# Altium PCB CareBoard_SMD_ORDERED_6.29.PcbDoc
Units mil, origin at the board's own origin, x right, y up, seen from the top; angles counter-clockwise.
Board outline 6963 x 2600 mil, 2 copper layers (Top Layer, Bottom Layer); 85 components, 76 nets, 330 pads, 96 vias.
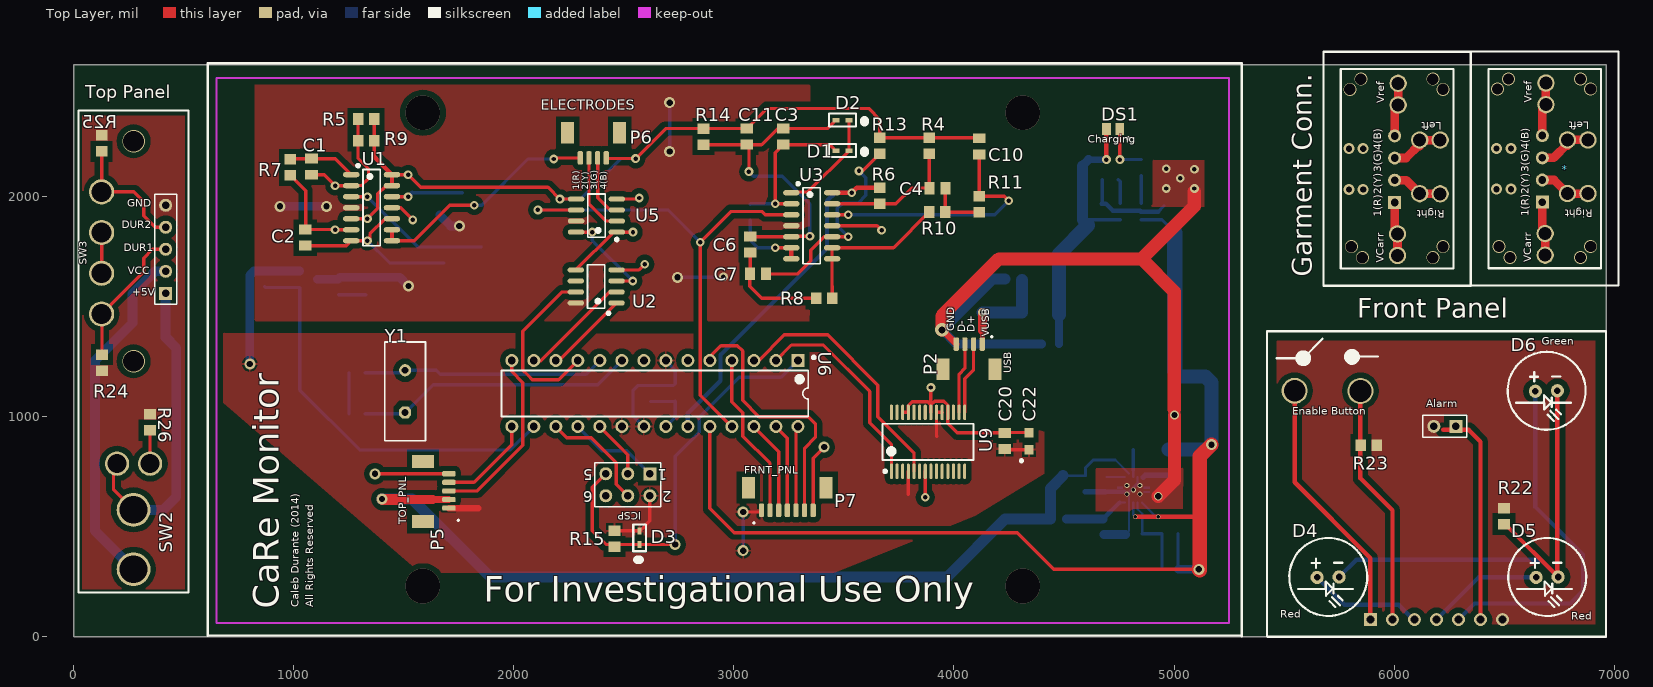
[diagram p0: Top Layer view]
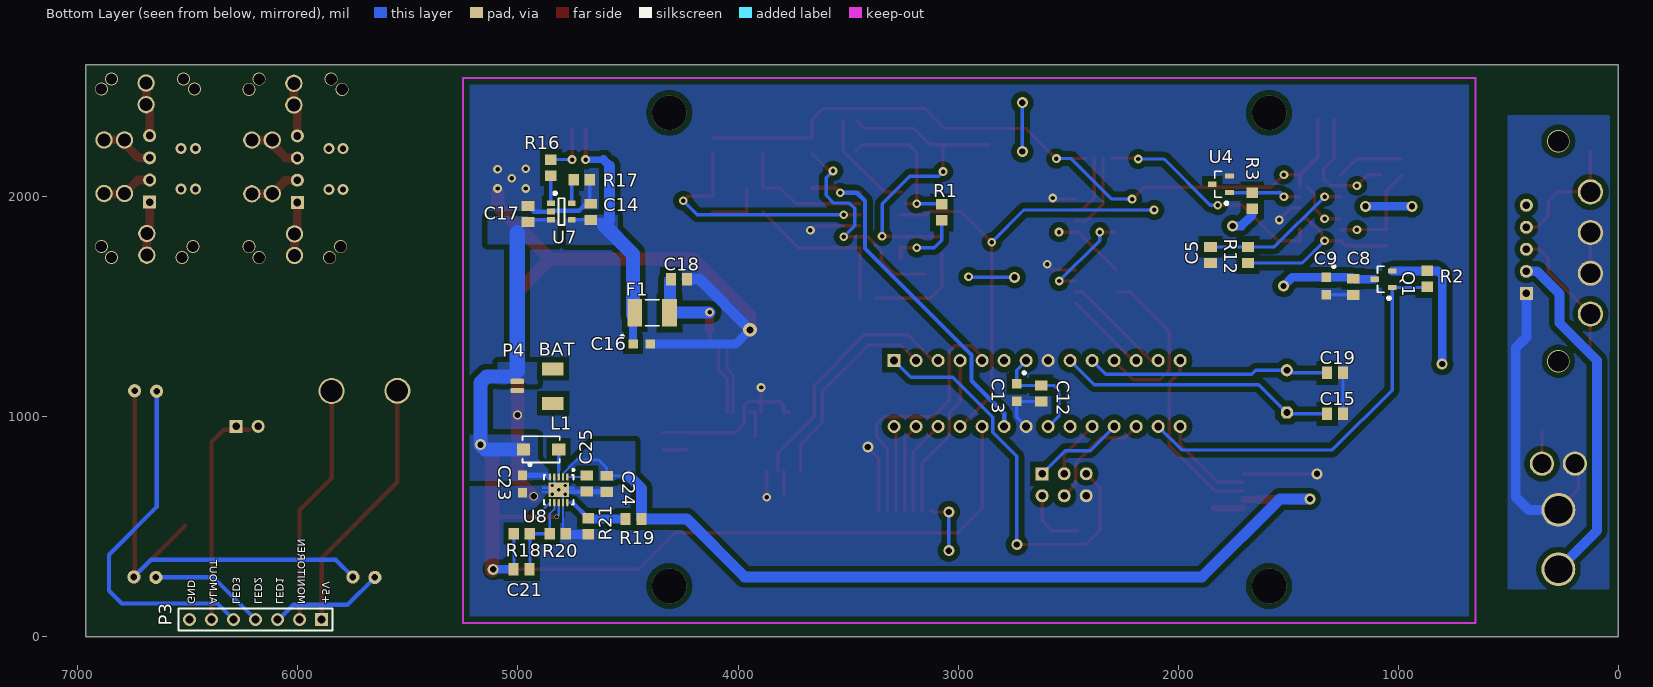
[diagram p1: Bottom Layer view, seen from below]
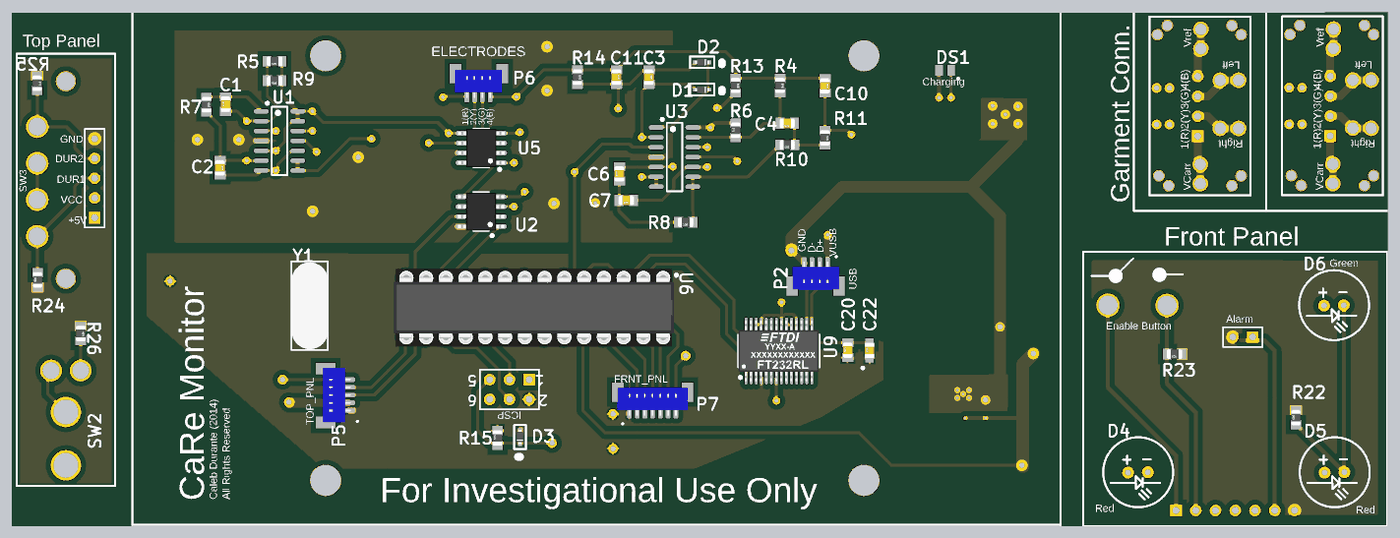
[diagram p2: 3D render of the assembled board from above, using the file's embedded part models]
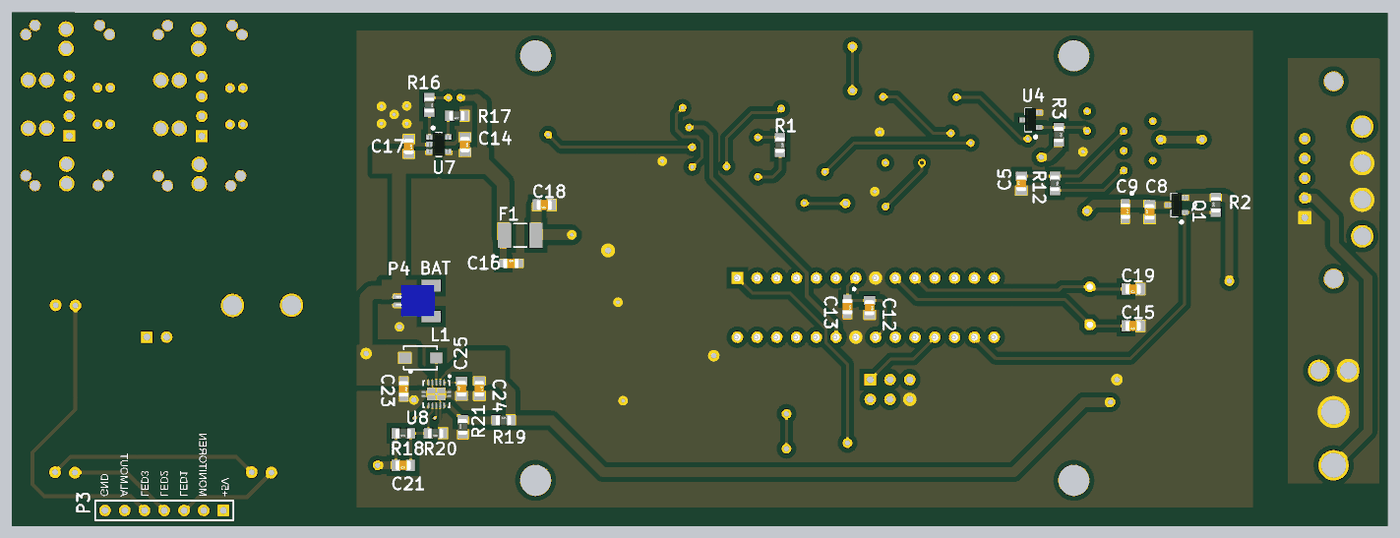
[diagram p3: 3D render of the assembled board from below, using the file's embedded part models]

## Layer stack, top to bottom
Top Layer: signal copper 1.4
Dielectric: dielectric 12.6, FR-4, Dk 4.8
Bottom Layer: signal copper 1.4

## Board outline
0,0 6963,0 6963,2600 0,2599

## Design rules (kind name [scope] priority, off if disabled: settings)
Clearance "Polygon Clearance" [All vs InPolygon] p1: gap=25 // Distance between polygons and different nets
Clearance [All] p2: gap=5 // Trace/Space
ComponentClearance [All] p1: gap=20 collisioncheckmode=3 verticalgap=20 showdistances=TRUE
FanoutControl Fanout_Default [All] p5: bgadir=Out bgaviamode=Centered fanoutstyle=Auto fanoutdirection=OutOnly viagrid=1 // Fanout_Default (Default Rule)
HoleSize [All] p1: absolutevalues=TRUE maxlimit=160 minlimit=15 maxpercent=80.000 minpercent=20.000
MinimumAnnularRing [All] p1: minimumring=8
MinimumSolderMaskSliver [All] p1: minsoldermaskwidth=1
PolygonConnect PolygonConnect_1 [All vs IsNamedPolygon('+5V')] p1: connectstyle=Relief reliefconductorwidth=10 reliefentries=4 polygonreliefangle="90 Angle" airgapwidth=10
PolygonConnect [All] p2: connectstyle=Direct reliefconductorwidth=10 reliefentries=4 polygonreliefangle="90 Angle" airgapwidth=10
RoutingVias [All] p1: holewidth=20 width=40 viastyle="Through Hole" minholewidth=15 minwidth=35 maxholewidth=30 maxwidth=50
SilkToSilkClearance [All] p1: silktosilkclearance=1
SilkToSolderMaskClearance SilkscreenOverComponentPads [IsPad] p1: minsilkscreentomaskgap=1 clearancetoexposedcopper=TRUE
SolderMaskExpansion [All] p1: expansion=4
Width [All] p1: maxlimit=250 minlimit=7 preferedwidth=15
22 further rules are at their usual default settings.

## Classes and differential pairs
component class CaRe_Schematic_SMD_TOP_PANEL: R24 R25 R26 SW2 SW3 ""
component class CaRe_Schematic_SMD_FRONT_PANEL: Alarm D4 D5 D6 "Enable Button" P3 R22 R23

## Components (designator, comment, footprint, x,y, rotation, side; value= is the part's Value field where it differs from the comment)
* "GARMENT_CONNECTOR" GARMENT_DIN 6940.5,1675 r90 top
Alarm "Speaker" HDR1X2 6280.5,956.5 r180 top (schematic designator LS1)
C1 "Capacitor" CAP0805 1081.19,2136 r90 top
C2 "Capacitor" CAP0805 1052.5,1814 r270 top
C3 "Capacitor" CAP0805 3224.5,2272.9 r270 top
C4 "Capacitor" CAP0805 3924.82,2039 r180 top
C5 "Capacitor" CAP0805 1853.5,1735 r90 bottom
C6 "Capacitor" CAP0805 3074.5,1783 r90 top
C7 "Capacitor" CAP0805 3109.29,1649 r180 top
C8 "Capacitor" CAP0805 1203.9,1590.68 r90 bottom
C9 "10uF" 0805TANTCAP 1327.5,1594.13 r270 bottom
C10 "Capacitor" CAP0805 4115.5,2229 r270 top
C11 "Capacitor" CAP0805 3059.5,2272.9 r270 top
C12 "Capacitor" CAP0805 2621.5,1105.76 r270 bottom
C13 "10uF" 0805TANTCAP 2733.99,1110.68 r270 bottom
C14 "Capacitor" CAP0805 4670.35,1931.42 r270 bottom
C15 "Capacitor" CAP0805 1287.5,1013.23 r0 bottom
C16 "10uF" 0805TANTCAP 4437.5,1330 r180 bottom
C17 "Capacitor" CAP0805 4954.5,1922 r270 bottom
C18 "Capacitor" CAP0805 4268.5,1625.13 r0 bottom
C19 "Capacitor" CAP0805 1287.5,1199.6 r0 bottom
C20 "Capacitor" CAP0805 4230.82,890.31 r90 top
C21 "Capacitor" CAP0805 4983.09,307 r0 bottom
C22 "10uF" 0805TANTCAP 4340.82,889 r90 top
C23 "10uF" 0805TANTCAP 4980.09,694 r270 bottom
C24 "Capacitor" CAP0805 4597.09,695.58 r270 bottom
C25 "Capacitor" CAP0805 4687.09,696 r90 bottom
D1 "BAT42W" SOD-523 3493.5,2208.9 r180 top
D2 "BAT42W" SOD-523 3493.5,2347.9 r180 top
D3 "BAT42W" SOD-523 2571.51,450 r90 top
D4 "10mmTT" 10MMLED 5650.01,270 r0 top
D5 "10mmTT" 10MMLED 6645.01,270 r0 top
D6 "10mmTT" 10MMLED 6642.01,1116 r0 top
DS1 "CHIPLED_RED" CHIP_LED0805 4723.5,2307.59 r180 top
"Enable Button" "SW-SPST" SPST 5548.01,1118 r0 top (schematic designator S1)
F1 "MF-MSMF050-1" "MF-MSMF050 FOOTPRINT" 4390.5,1472 r0 bottom
"Garment Conn." "GARMENT_CONNECTOR" GARMENT_DIN 6269.5,1674 r90 top (schematic designator *)
ICSP "ICSP" HDR2X3 2618.21,741 r180 top (schematic designator P1)
L1 "4.7uH" INDP4330X10N 4895.09,851 r180 bottom
P2 "USB" "JST 4-PIN SMD" 4187.61,1339.17 r180 top
P3 "Header 7" HDR1X7 5892.5,78.5 r0 bottom
P4 "BAT" "JST-2 PIN SMD CONNECTOR" 5019.5,1219 r270 bottom
P5 "TOP_PNL" "JST 5 PIN SMD" 1715.5,525 r90 top
P6 "ELECTRODES" "JST 4-PIN SMD" 2243.5,2167 r0 top
P7 "FRNT_PNL" "JST-SH 7-PIN VERTICAL SMD" 3065.5,550 r0 top
P8 "Header 5" HDR1X5 418.5,1561 r90 top
Q1 "BSP304" SOT23_L 1067.5,1625.13 r0 bottom
R1 "Resistor" RES0805 3074.82,1928.9 r270 bottom
R2 "Resistor" RES0805 868.5,1626.5 r90 bottom
R3 "Resistor" RES0805 1664.19,1982 r270 bottom
R4 "Resistor" RES0805 3888.52,2231 r270 top
R5 "Resistor" RES0805 1329.19,2352.71 r180 top
R6 "Resistor" RES0805 3663.5,2004 r90 top
R7 "Resistor" RES0805 984.5,2133.46 r270 top
R8 "Resistor" RES0805 3410.5,1538 r180 top
R9 "Resistor" RES0805 1329.19,2254.69 r180 top
R10 "Resistor" RES0805 3924.82,1930.42 r180 top
R11 "Resistor" RES0805 4115.5,1966 r270 top
R12 "Resistor" RES0805 1683.5,1735 r270 bottom
R13 "Resistor" RES0805 3663.5,2231 r270 top
R14 "Resistor" RES0805 2862.5,2272.9 r270 top
R15 "Resistor" RES0805 2457.51,446 r90 top
R16 "Resistor" RES0805 4850.5,2132.22 r270 bottom
R17 "Resistor" RES0805 4710.77,2077.32 r0 bottom
R18 "Resistor" RES0805 4982.09,469 r0 bottom
R19 "Resistor" RES0805 4475.09,535 r180 bottom
R20 "Resistor" RES0805 4819.09,469 r0 bottom
R21 "Resistor" RES0805 4681.09,502 r90 bottom
R22 "Resistor" RES0805 6499.5,548.5 r90 top
R23 "Resistor" RES0805 5885.5,870.5 r180 top
R24 "Resistor" RES0805 129.5,1246 r90 top
R25 "Resistor" RES0805 127.5,2242 r270 top
R26 "Resistor" RES0805 347.5,975 r270 top
SW2 "On/Off Rocker Swith" POWER_SWITCH 272.5,307 r90 top
SW3 "Slider Switch" SLIDER 272.5,1252 r90 top
U1 "TLV274IN" TI-D14_L 1354.19,1950 r0 top
U2 "XXXXX" SOIC-8 2374.5,1592 r180 top
U3 "TLV274IN" TI-D14_L 3353.82,1867.9 r0 top
U4 "LM4040" SOT23_L 1806.19,2056 r0 bottom
U5 "LT1920" LT-S8-8_L(LT1920) 2375.82,1914 r180 top
U6 "ATmega328P-PU" 28P3 2641.19,1105.76 r270 top
U7 "MCP73831T-2ADI/OT" SOT-23-OT5_L 4802.5,1932.32 r180 bottom
U8 "TPS61200DRCT" DRC10-2400X1650TP 4815.09,668 r270 bottom
U9 "FT232RL-Reel" SSOP-28_L(FTDI) 3882.5,886 r90 top
Y1 "ECS-10-3-1" HC-49U 1506.5,1115.23 r90 top

## Footprints (in the part's own frame and the unit in brackets; to place one, negate y for a bottom-side part, rotate by r counter-clockwise, add the part's x,y. Pads: shape width x height; smd on the part's side, far side on the other; paste and mask are expansions set on the pad)
10MMLED [mil]
  round 60 hole 30: 1(0,0) 2(100,2)
  silkscreen extent -126,-175 228,179
28P3 [mm] "DIP, 28-Leads, Row Spacing 7.62mm, Pitch 2.54mm, Body 34.67x7.3mm"
  rect 1.5x1.5 hole 0.9: 1(-3.81,16.51)
  round 1.5 hole 0.9: 2(-3.81,13.97) 3(-3.81,11.43) 4(-3.81,8.89) 5(-3.81,6.35) 6(-3.81,3.81) 7(-3.81,1.27) 8(-3.81,-1.27) 9(-3.81,-3.81) 10(-3.81,-6.35) 11(-3.81,-8.89) 12(-3.81,-11.43) 13(-3.81,-13.97) 14(-3.81,-16.51) 15(3.81,-16.51) 16(3.81,-13.97) 17(3.81,-11.43) 18(3.81,-8.89) 19(3.81,-6.35) 20(3.81,-3.81) 21(3.81,-1.27) 22(3.81,1.27) 23(3.81,3.81) 24(3.81,6.35) 25(3.81,8.89) 26(3.81,11.43) 27(3.81,13.97) 28(3.81,16.51)
  silkscreen extent -4.29,-17.7 2.65,18.46, body extent -5.05,-18 5.05,18, height 8.89
0805TANTCAP [mm] "0805 TANTALUM CAPACITOR MOLDED"
  rect 1.1x1.05 smd: 1(-1,0) 2(1,0)
  silkscreen extent -2.36,0.76 -2.16,0.96, body extent -1,-0.62 1,0.63, height 0.78
CAP0805 [mm] "Chip Capacitor 0805 Package"
  rect 1.15x1.45 smd: 1(-0.925,0) 2(0.925,0)
  body extent -1,-0.62 1,0.63, height 0.78
CHIP_LED0805 [mm] "LED 0805"
  rect 1x1.35 smd: 1(-0.775,0) 2(0.775,0)
  silkscreen extent -1.75,1.02 -1.65,1.12, body extent -1.07,-0.7 1.07,0.7, height 1.1
DRC10-2400X1650TP [mm] "SON, 10-Leads, Body 3x3mm, Pitch 0.5mm, Thermal Pad 2.4x1.65mm, TI Recommended"
  oval 0.85x0.28 smd paste-0.025 mask+0.07: 1(-1.475,1) 2(-1.475,0.5) 3(-1.475,0) 4(-1.475,-0.5) 5(-1.475,-1) 6(1.475,-1) 7(1.475,-0.5) 8(1.475,0) 9(1.475,0.5) 10(1.475,1)
  rect 1.65x2.4 smd paste-0.825 mask+0.07: 11(0,0)
  Top Layer region: -0.39,1.9 -0.11,1.9 -0.11,1.2 -0.39,1.2
  Top Layer region: 0.39,1.2 0.11,1.2 0.11,1.9 0.39,1.9
  Top Layer region: 0.39,-1.9 0.11,-1.9 0.11,-1.2 0.39,-1.2
  Top Layer region: -0.39,-1.2 -0.11,-1.2 -0.11,-1.9 -0.39,-1.9
  silkscreen extent -2.34,-1.7 1.7,1.75, body extent -1.55,-1.55 1.55,1.55, height 1
GARMENT_DIN [mm]
  rect 1.5x1.5 hole 0.9: 1(7.62,6.782)
  round 1.5 hole 0.9: 2(10.179,6.782) 3(12.738,6.782) 4(15.298,6.782)
  round 2 hole 1.5: 6(3.99,6.452) 6(8.611,1.524) 6(14.808,1.524) 6(21.363,6.375) 7(1.499,6.452) 7(8.627,3.886) 7(14.808,3.886) 7(18.872,6.375)
  Top Layer lines w1: 7.62,6.782 4.32,6.782 3.99,6.452 1.499,6.452 ; 10.179,6.782 10.179,5.439 8.611,3.87 8.611,1.549 ; 12.738,6.782 12.738,5.473 14.326,3.886 14.808,3.886 14.122,3.886 ; 15.298,6.782 18.466,6.782 18.872,6.375 21.363,6.375 ; 14.808,3.861 14.808,1.524
  silkscreen extent -2,-2 25,15
HC-49U [mm] "Quartz Crystal, Thru-Hole; 2 Leads; Body 11.35 x 4.65 x 13.46 mm (LxWxH max)"
  oct 1.4x1.4 hole 0.8: 1(-2.44,0)
  round 1.4 hole 0.8: 2(2.44,0)
  silkscreen extent -5.7,-2.35 5.7,2.35, body extent -5.59,-2.36 5.58,2.31, height 13.49
HDR1X2 [mm] "Connector; Header; 2 Position"
  rect 1.5x1.5 hole 0.9: 1(0,0)
  round 1.5 hole 0.9: 2(2.54,0)
  silkscreen extent -1.27,-1.27 3.81,1.27
HDR1X5 [mm] "Connector; Header; 5 Position"
  rect 1.5x1.5 hole 0.9: 1(0,0)
  round 1.5 hole 0.9: 2(2.54,0) 3(5.08,0) 4(7.62,0) 5(10.16,0)
  silkscreen extent -1.27,-1.27 11.43,1.27
HDR1X7 [mm] "Connector; Header; 7 Position"
  rect 1.5x1.5 hole 0.9: 1(0,0)
  round 1.5 hole 0.9: 2(2.54,0) 3(5.08,0) 4(7.62,0) 5(10.16,0) 6(12.7,0) 7(15.24,0)
  silkscreen extent -1.27,-1.27 16.51,1.27
HDR2X3 [mm] "Connector; Header; 3x2 Position"
  rect 1.5x1.5 hole 0.9: 1(0,0)
  round 1.5 hole 0.9: 2(0,2.54) 3(2.54,0) 4(2.54,2.54) 5(5.08,0) 6(5.08,2.54)
  silkscreen extent -1.27,-1.27 6.35,3.81
INDP4330X10N [mm] "Precision Wire Wound Inductor, 2-Leads, Body 4.30x3.00mm, IPC Medium Density"
  rect 1.55x1.4 smd: 1(-2.025,0) 2(2.025,0)
  silkscreen extent -2.15,-1.5 2.15,1.52
"JST 4-PIN SMD" [mm] "BM04B-SRSS-TB"
  rrect50% 0.6x1.55 smd: 1(1.499,0.229) 2(2.498,0.229) 3(3.497,0.229) 4(4.496,0.229)
  rect 1.5x2.5 smd: ""(0.025,3.15) ""(6.045,3.15)
  body extent 0,0 6,3.6, height 4.25
"JST 5 PIN SMD" [mil] "BM05B-SRSS-TB"
  rrect50% 23.62x61.02 smd: 1(60,10) 2(99,10) 3(138,10) 4(177,10) 5(216,10)
  rect 59.06x98.43 smd: ""(-1,128) ""(272,128)
  body extent 0,0 276,142
"JST-2 PIN SMD CONNECTOR" [mm] "SM02B-SRSS-TB"
  rrect50% 0.6x1.55 smd: 1(1.473,0.406) 2(2.54,0.406)
  rect 1.5x2.5 smd: ""(0.051,4.521) ""(4.013,4.521)
  body extent 0,0 4,4.95, height 3.01
"JST-SH 7-PIN VERTICAL SMD" [mm]
  rrect50% 0.6x1.55 smd: 1(1.524,0.635) 2(2.519,0.635) 3(3.514,0.635) 4(4.508,0.635) 5(5.503,0.635) 6(6.498,0.635) 7(7.493,0.635)
  rect 1.5x2.5 smd: ""(0.025,3.251) ""(8.992,3.251)
  body extent 0,0.21 9,3.81, height 4.25
LT-S8-8_L(LT1920) [mm] "SOIC, 8-Leads, Body 4.9x3.9mm, Pitch 1.27mm, IPC High Density"
  oval 1.9x0.6 smd: 1(-2.35,1.905) 2(-2.35,0.635) 3(-2.35,-0.635) 4(-2.35,-1.905) 5(2.35,-1.905) 6(2.35,-0.635) 7(2.35,0.635) 8(2.35,1.905)
  silkscreen extent -2.48,-2.5 1,2.88, body extent -3,-2.45 3,2.45, height 1.75
"MF-MSMF050 FOOTPRINT" [mm] "PTC FUSE"
  rect 1.7x3.2 smd: 1(-2,0) 2(2,0)
  silkscreen extent -0.8,-1.5 0.8,1.5, body extent -2.37,-1.71 2.36,1.71, height 0.85
POWER_SWITCH [mm] "SPST Rocker w/ LED"
  round 3.9 hole 3.2: 1(0,0) 2(6.858,0)
  round 2.8 hole 2.2: 3(12.192,1.905) 4(12.192,-1.905)
RES0805 [mm] "Chip Resistor, 2-Leads, Body 2.00x1.25mm, IPC Medium Density"
  rect 1.2x1.35 smd: 1(-0.925,0) 2(0.925,0)
  body extent -1,-0.62 1,0.63, height 0.78
SLIDER [mm]
  round 2.9 hole 2.3 unplated: 1(5.461,3.683) 2(10.16,3.683) 3(14.859,3.683) 4(19.558,3.683)
SOD-523 [mm]
  rect 0.8x0.5 smd: 1(-0.762,0) 2(0.762,0)
  silkscreen extent -2.54,-0.76 1.55,0.74, body extent -0.91,-0.42 0.91,0.42, height 0.71
SOIC-8 [mm] "SOIC, 8-Leads, Body 4.9x3.9mm, Pitch 1.27mm, IPC High Density"
  oval 1.9x0.6 smd: 1(-2.35,1.905) 2(-2.35,0.635) 3(-2.35,-0.635) 4(-2.35,-1.905) 5(2.35,-1.905) 6(2.35,-0.635) 7(2.35,0.635) 8(2.35,1.905)
  silkscreen extent -1.55,-2.5 1,3.22, body extent -3,-2.45 3,2.45, height 1.75
SOT23_L [mm] "SOT23, 3-Leads, Body 2.9x1.3mm, Pitch 0.95mm, Lead Span 2.3mm, IPC High Density"
  rect 1x0.6 smd: 1(-1,0.95) 2(-1,-0.95) 3(1,0)
  silkscreen extent -0.76,-1.5 0.7,2.31, body extent -1.27,-1.52 1.27,1.48, height 1.1
SOT-23-OT5_L [mm] "SOT23, 5-Leads, Body 2.9x1.6mm, Pitch 0.95mm, Lead Span 2.7mm, IPC High Density"
  rect 0.9x0.65 smd: 1(-1.2,0.95) 2(-1.2,0) 3(-1.2,-0.95) 4(1.2,-0.95) 5(1.2,0.95)
  silkscreen extent -0.86,-1.55 0.35,2.23, body extent -1.53,-1.5 1.53,1.5, height 1.45
SPST [mm] "Momentary Enable Button"
  round 3 hole 2.5: 1(0,0) 2(7.595,-0.025)
  silkscreen extent -2.08,3.35 9.63,5.99
SSOP-28_L(FTDI) [mm] "SOP, 28-Leads, Body 10.2x5.3mm, Pitch 0.65mm, IPC High Density"
  oval 1.8x0.35 smd: 1(-3.4,4.225) 2(-3.4,3.575) 3(-3.4,2.925) 4(-3.4,2.275) 5(-3.4,1.625) 6(-3.4,0.975) 7(-3.4,0.325) 8(-3.4,-0.325) 9(-3.4,-0.975) 10(-3.4,-1.625) 11(-3.4,-2.275) 12(-3.4,-2.925) 13(-3.4,-3.575) 14(-3.4,-4.225) 15(3.4,-4.225) 16(3.4,-3.575) 17(3.4,-2.925) 18(3.4,-2.275) 19(3.4,-1.625) 20(3.4,-0.975) 21(3.4,-0.325) 22(3.4,0.325) 23(3.4,0.975) 24(3.4,1.625) 25(3.4,2.275) 26(3.4,2.925) 27(3.4,3.575) 28(3.4,4.225)
  silkscreen extent -3.52,-5.25 2.1,5.25, body extent -3.88,-5.12 3.88,5.21, height 2.16
TI-D14_L [mm] "SOIC, 14-Leads, Body 8.65x3.9mm, Pitch 1.27mm, IPC High Density"
  oval 1.9x0.6 smd: 1(-2.35,3.81) 2(-2.35,2.54) 3(-2.35,1.27) 4(-2.35,0) 5(-2.35,-1.27) 6(-2.35,-2.54) 7(-2.35,-3.81) 8(2.35,-3.81) 9(2.35,-2.54) 10(2.35,-1.27) 11(2.35,0) 12(2.35,1.27) 13(2.35,2.54) 14(2.35,3.81)
  silkscreen extent -1.7,-4.4 1,4.98, body extent -2,-4.38 2,4.38, height 1.75

## Part data
Alarm: "Loudspeaker"
C1 C2 C3 C4 C5 C6 C7 C8 C10 C11 C12 C14 C15 C17 C18 C19 C20 C21 C24 C25: library part "Chip Cap"
C9 C13 C16 C22 C23: library part "Cap Tant", "Polarized Capacitor (Radial)"
D1 D2 D3: "Schottky Diode"
D4 D5 D6: library part 10mmLED, "Typical RED LED"
DS1: "Typical RED LED"
"Enable Button": "Single-Pole, Single-Throw Switch"
F1: library part "PTC Fuse", "PTC Resettable Fuse 500 mA"
ICSP: library part "Header 3X2", "Header, 3-Pin, Dual row"
L1: library part Inductor, "Inductor"
P2 P6: library part "Header 4", "Header, 4-Pin"
P3: "Header, 7-Pin"
P4: library part "Header 2", "Header, 2-Pin"
P5: library part "Header 5", "Header, 5-Pin"
P7: library part "Header 7", "Header, 7-Pin"
P8: "Header, 5-Pin"
Q1: "P-channel Enhancement Mode Vertical D-MOSFET"
R1 R2 R3 R4 R5 R6 R7 R8 R9 R10 R11 R12 R13 R14 R15 R16 R17 R18 R19 R20 R21 R22 R23 R24 R25 R26: library part "Chip Res"
SW2: library part "ON/OFF Rocker"
SW3: library part SLIDER
U1 U3: "JFET-Input Operational Amplifier"
U2: library part DS1804-050, "Nonvolatile Trimmer Potentiometer"
U4: "Precision Micropower Shunt Voltage Reference, 0.1% accuracy, 2.5 V, 15 ppm / degC, 15 mA, -40 to 85 degC, 3-pin SOT-23 (DBZ), Green (RoHS & no Sb/Br)"
U5: library part AD620AN, "Low-Cost, Low-Power Instrumentation Amplifier"
U6: "8-bit AVR Microcontroller, 32KB Flash, 1KB EEPROM, 2KB SRAM, 28-pin PDIP, Industrial Grade (-40°C to 85°C)"
U7: "Miniature Single-Cell, Fully Integrated Li-Ion, Li-Polymer Charge Management Controller, 4.2V, 5-Pin SOT-23, Industrial Temperature, Tape and Reel"
U8: "Boost Voltage Converter with 0.3 to 5.5 V Input and 1.8 to 5.5 V Output, -40 to 85 degC, 10-Pin SON (DRC), Green (RoHS & no Sb/Br)"
U9: "USB UART Asynchronous Serial Data Transfer Chip, SSOP-28, Tape and Reel"
Y1: library part ECS-10-13-1, "Crystal Oscillator"

## Via types
v1: diameter 40, hole 20, Top Layer to Bottom Layer, 40 vias
v2: diameter 50, hole 28, Top Layer to Bottom Layer, 24 vias
v3: diameter 59.06, hole 51.18, Top Layer to Bottom Layer, 16 vias
v4: diameter 22.83, hole 14.96, Top Layer to Bottom Layer, 5 vias
v5: diameter 157/157 (per signal layer), hole 157, Top Layer to Bottom Layer, 4 vias
v6: diameter 20, hole 15, Top Layer to Bottom Layer, 2 vias
v7: diameter 40, hole 28, Top Layer to Bottom Layer, 2 vias
v8: diameter 102.36, hole 94.49, Top Layer to Bottom Layer, 2 vias
v9: diameter 62, hole 32, Top Layer to Bottom Layer, 1 vias

## Nets (pads, with @x,y where several pads share a name; then routed paths per layer and width w, separated by ;. In a path a pad name is that pad's centre, name@x,y a point inside that pad or via, vN(x,y) a via of type N, cw(c..) or ccw(c..) an arc to the next point about the centre after c; other vN are vias at no path point)
+3.3V: U9.17
+5V: C12.1 C13.1 C20.1 C22.1 D3.2 ICSP.2 P5.1 P7.1 Q1.2 R2.2 R15.2 U6.7 U6.20 U6.21 U9.4 U9.19 U9.20 | length 2179.7
  Top Layer w15: 1836.5,584 1837.5,585 ; R15.2 D3.2@2569.09,482.41 ; D3.2 2618.21,526.7 ICSP.2 ; v2(3042.5,567.63) 3118.13,567.63 P7.1 ; 3792.94,647 U9.4 ; 3921.5,911 3920.89,911.61 U9.20 U9.19 ; C20.1 4235.08,849.63 C22.1
  Top Layer w30: P5.1 1837.5,585
  Bottom Layer w15: Q1.2@1027.74,1662.92 Q1.2 ; U6.21@2590.5,954.91 2541.74,1003.68 2541.74,1119.24 2564.68,1142.17 C12.1 C13.1@2726.12,1142.17 ; U6.7@2690.5,1254.91 2733.99,1211.43 C13.1 ; v2(3042.5,391.28) v2(3042.5,567.63)
  Bottom Layer w40: v2(800.5,1240) 800.5,1643 820.42,1662.92 R2.2 Q1.2@1027.74,1662.92
+5V_F: "Enable Button.1" P3.1 | length 1182.2
  Top Layer w20: 5548.01,1118 5548.01,702 5892.5,357.5 P3.1
+5V_T: P8.1 SW2.2 SW2.3 SW3.2 SW3.3 | length 1602.6
  Top Layer w15: SW3.2 SW3.3 ; SW2.3 181.5,771 181.5,668 SW2.2
  Bottom Layer w45: SW2.2 407.39,577 466.5,636.11 466.5,1313 418.5,1361 P8.1
ALMOUT: P7.6 U6.5 | length 1211.4
  Top Layer w15: U6.5@2890.5,1254.91 2890.5,1272 2941.5,1323 3016.5,1323 3040.5,1299 3040.5,1074 3113.92,1000.58 3338.92,1000.58 3370.93,968.58 3370.93,907.4 3321.34,857.81 P7.6
ALMOUT_F: Alarm.1 P3.6 | length 1000.4
  Top Layer w20: 6222.5,940.5 6338.5,940.5 6392.5,886.5 P3.6
ATRX: U6.2 U9.1 | length 947.6
  Top Layer w15: U6.2@3190.5,1254.91 3261.59,1326 3406.5,1326 3617.5,1115 3617.5,973 3716.16,874.34 U9.1
ATTX: U6.3 U9.5 | length 1166.5
  Top Layer w15: U6.3@3090.5,1254.91 3112.42,1254.91 3229.5,1372 3426.08,1372 3654.5,1143.58 3654.5,1000 3818.53,835.98 U9.5
AVCC_CTRL: Q1.1 R2.1 U6.16 | length 1846
  Bottom Layer w15: R2.1 870.86,1587.72 Q1.1 1028.13,1121.37 1300.5,849 1984.59,849 U6.16@2090.5,954.91
AVS: C8.2 C9.1 Q1.3 R3.2 U1.4 U2.8 U3.4 U5.7 | length 1185.4
  Bottom Layer w15: v2(2708.5,2204.94) v2(2708.5,2427) ; v2(2743.5,1633.5) 2950.11,1633.5 v1(2952.5,1635.89)
  Bottom Layer w40: v2(938.5,1956.21) v2(1148.5,1956.21) ; Q1.3 1201.94,1625.13 C8.2 1210.31,1633.5 C9.1 1481.78,1633.5 v2(1521.64,1593.63) ; 1664.19,1916.31 1713.14,1867.36 v2(1752.5,1867.36)
BATSTAT: U6.6
D+: P2.2 U9.15 | length 327.1
  Top Layer w15: U9.15 4048.84,1172.34 4089.28,1212.77 P2.2
D-: P2.3 U9.16 | length 321.4
  Top Layer w15: U9.16 4023.25,1192.75 4049.94,1219.44 P2.3
DUR1: P5.3 U6.14 | length 827.2
  Top Layer w15: P5.3 1833.5,663 2041.5,871 2041.5,1155 1990.5,1206 U6.14@1990.5,1254.91
DUR1_T: P8.3 R24.2 SW3.1 | length 635.1
  Top Layer w15: R24.2 129.5,1465 SW3.1 318.5,1658 318.5,1721 358.5,1761 P8.3
DUR2: P5.4 U6.15 | length 437.7
  Top Layer w15: P5.4 1819.5,702 1990.5,873 U6.15@1990.5,954.91
DUR2_T: P8.4 R25.2 SW3.4 | length 579.3
  Top Layer w15: R25.2 SW3.4 274.51,2022 318.5,1978 318.5,1913 370.5,1861 P8.4
GAINFBK: U3.3 U5.6 U6.25 | length 2348.2
  Top Layer w15: v1(2109.5,1939.68) 2110.18,1939 U5.6 ; U6.25@2990.5,954.91 2847.5,1097.91 v1(2847.5,1793) 2987.5,1933 3127.5,1933 3142.61,1917.9 U3.3
  Bottom Layer w15: v1(2109.5,1939.68) 2700.83,1939.68 v1(2847.5,1793)
GND: C5.1 C8.1 C9.2 C12.2 C13.2 C14.1 C15.1 C16.2 C17.1 C18.1 C19.1 C20.2 C22.2 C23.2 C24.2 C25.1 ICSP.6 P2.4 P4.2 P5.5 P7.7 R17.1 R20.1 R21.1 U1.11 U2.4 U3.11 U4.2 U5.4 U6.8 U6.22 U7.2 U8.4 U8.9 U8.11 U9.7 U9.18 U9.21 U9.25 U9.26 | length 7297.7
  Top Layer w15: v2(1369.5,741) P5.5 ; U1.11 1485.95,1950 v1(1541.5,1894.45) ; U2.4 2569.5,1667 v1(2595.5,1693) ; U5.4 v1@2565.57,1989 ; P7.7 3360.5,812 v2(3410.5,862) ; U3.11 3650.61,1867.9 v1(3671.5,1847) ; U9.26 U9.25 3792.94,1050.23 3810.5,1067.79 3881.71,1067.79 U9.21@3895.3,1054.2 ; v1(3869.71,634.2) U9.7 ; U9.21 U9.21@3895.3,1054.2 ; v1@3895.5,1133 3895.3,1132.8 U9.21@3895.3,1054.2 ; C20.2 4015.78,926.73 3972.07,970.43 U9.18 3972.07,1053.43 3954.5,1071 3912.1,1071 U9.21@3895.3,1054.2 ; C20.2@4232.46,928.37 C22.2
  Top Layer w30: v9(3945.61,1395.17) P2.4
  Top Layer w60: v9(3945.61,1395.17) 3945.61,1458.11 4204.5,1717 4852.5,1717 ; v7(4928.5,638.47) 5001.77,711.74 v7(5001.77,1008) ; 5001.5,1033 5001.5,1568 4852.5,1717 ; v1@5091.5,2022 5091.5,1956 4852.5,1717
  Bottom Layer w10: C9.2@1327.01,1554.26 C9.2 ; v4(4785.56,648.31) 4795.4,638.47 4795.4,577.88 R20.1@4795.4,481.73 ; U8.11@4834.77,697.53 U8.4
  Bottom Layer w15: C8.1 C9.2@1327.01,1554.26 ; C15.1 C19.1 ; C12.2 2732.02,1069.34 C13.2 2733.99,998.4 U6.22@2690.5,954.91 ; C14.1 4674.35,1971.83 R17.1 ; U8.11@4774.29,659.58 v4(4785.56,648.31) ; U8.11@4795.4,658.16 U8.11@4834.77,697.53 ; U7.2@4846.07,1936 U7.2 ; 4928.41,1932.32 C17.1
  Bottom Layer w20: C14.1 4690.67,1967.83 4722.5,1936 U7.2@4846.07,1936 ; C25.1 U8.11@4774.29,659.58 ; U7.2 4928.41,1932.32
  Bottom Layer w25: C24.2 C25.1@4686.67,659.16
  Bottom Layer w40: v9(3945.61,1395.17) 4010.78,1330 C16.2 ; R21.1 R20.1@4779.25,465.58
  Bottom Layer w50: v9(3945.61,1395.17) 4175.57,1625.13 C18.1
  other v1: 3895.4,1132.9 2570.57,1994 4964.5,2037 5092.7,2037 5028.5,2084 5092.7,2125 4964.5,2127
  other v4: 4844.61,648.31 4815.09,668 4785.56,687.68 4844.61,687.68
GND_F: Alarm.2 P3.7 R22.2 R23.1
GND_T: P8.5 R24.1 R25.1 R26.1
LED1: P7.3 U6.26 | length 426.9
  Top Layer w15: U6.26@3090.5,954.91 3203.84,841.58 P7.3
LED1_F: D4.1 P3.3 | length 516.6
  Bottom Layer w20: D4.1 5774.48,145.53 6020.27,145.53 P3.3@6087.29,78.5
LED2: P7.4 U6.27 | length 401.7
  Top Layer w15: U6.27@3190.5,954.91 3243,902.41 P7.4
LED2_F: D5.1 P3.4 | length 531.8
  Bottom Layer w20: P3.4 6384,270 D5.1
LED3: P7.5 U6.28 | length 383.4
  Top Layer w15: P7.5 3282.17,946.58 U6.28@3290.5,954.91
LED3_F: D6.1 P3.5 | length 1616.4
  Bottom Layer w20: P3.5 6365.5,151.5 6800.5,151.5 6858.5,209.5 6858.5,373.5 6642.01,590 D6.1
MISO: ICSP.1 U6.18 | length 416.3
  Bottom Layer w15: U6.18@2290.5,954.91 2399.42,846 2513.21,846 ICSP.1
MONITOREN: P7.2 U6.4 | length 752.1
  Top Layer w15: U6.4@2990.5,1254.91 2990.5,1068.5 3040.39,1018.61 3040.39,912.11 3164.67,787.83 P7.2
MONITOREN_F: "Enable Button.2" P3.2 R23.2 | length 1098.8
  Top Layer w20: 5847.01,1117 5847.01,721 5992.5,575.5 P3.2
MOSI: ICSP.4 U6.17 | length 514.1
  Top Layer w15: U6.17@2190.5,954.91 2241.42,904 2351.5,904 2465.5,790 2465.5,693.7 ICSP.4
NetC1_1: C1.1 R5.2 R9.2 U1.2 | length 582.2
  Top Layer w13: U1.2 1307.91,2050 1339.26,2081.34 1339.26,2128.25 1292.77,2174.73 R9.2 R5.2
  Top Layer w15: C1.1 1138.68,2099.58 v1(1188.27,2050) U1.2
NetC1_2: C1.2 R7.1 U1.1 | length 308.2
  Top Layer w15: R7.1 987.04,2172.42 C1.2 1189.25,2172.42 U1.1
NetC2_1: C2.1 R7.2 U1.6 | length 485.8
  Top Layer w15: R7.2 1054.5,2027.05 1054.5,1852.42 C2.1 1187.85,1850.42 v1(1188.27,1850) U1.6
NetC2_2: C2.2 R12.2 U1.7 U1.10 | length 835
  Top Layer w15: C2.2 1239.25,1777.58 U1.7 v1(1335.07,1800) 1346.5,1811.43 1346.5,1830.76 1415.74,1900 U1.10@1435.07,1900
  Bottom Layer w15: v1(1335.07,1800) 1436.49,1698.58 R12.2
NetC3_1: C3.1 C6.2 C11.2 D2.2 R14.2 U3.5 | length 1530.8
  Top Layer w15: R14.2 C11.2 ; v1(3068.5,2113.78) 3068.5,2227.48 C11.2 ; C6.2 3076.02,1817.9 U3.5 3263.4,1820 v1(3345.5,1820) ; D2.2 3424.92,2309.31 3198.82,2309.31 3125.98,2236.48 C11.2
  Bottom Layer w15: v1(3068.5,2113.78) 3089.28,2093 3219.37,2093 3345.5,1966.86 v1(3345.5,1820)
NetC3_2: C3.2 D1.2 R1.1 U3.2 | length 699.2
  Top Layer w15: U3.2@3238.82,1967.9 v1(3187.9,1967.9) 3187.9,2199.87 C3.2 3435.92,2236.48 D1.2
  Bottom Layer w15: R1.1 3077.4,1967.9 v1(3187.9,1967.9)
NetC4_1: C4.1 R10.1 R11.2 | length 263.2
  Top Layer w15: C4.1 R10.1 3962.07,1929.58 R11.2
NetC4_2: C4.2 R4.2 R6.1 U3.13 | length 627.4
  Top Layer w15: U3.13 3446.65,1967.58 R6.1 3736.05,1967.58 3807.47,2039 C4.2 3888.52,2039.12 R4.2
NetC5_2: C5.2 R12.1 U1.3 | length 687.3
  Top Layer w13: U1.3@1261.09,1999.42 U1.3
  Top Layer w15: U1.3 v1(1335.07,2000)
  Bottom Layer w15: v1(1335.07,2000) 1563.65,1771.42 R12.1 C5.2
NetC6_1: C6.1 C7.2 R8.2 | length 477.3
  Top Layer w15: C6.1 3074.5,1650.63 C7.2 3072.87,1593.63 3129.5,1537 ; 3130.5,1538 R8.2
NetC7_1: C7.1 R13.2 U3.10 | length 1026.1
  Top Layer w15: C7.1 3290.68,1649 3349.5,1707.83 3349.5,1756 3411.4,1817.9 U3.10 v1(3519.74,1817.9) ; v1(3568.5,2117) 3585.92,2117 R13.2
  Bottom Layer w15: v1(3519.74,1817.9) 3470.5,1867.13 3470.5,1947 3494.5,1971 3564.5,1971 3599.5,2006 3599.5,2086 v1(3568.5,2117)
NetC10_2: C10.2 R11.1 U3.12 | length 1162.3
  Top Layer w15: U3.12 v1(3519.74,1917.9) ; C10.2 R11.1 4228.88,2002.42 v1(4249.5,1981.8)
  Bottom Layer w15: v1(3519.74,1917.9) 4185.61,1917.9 v1(4249.5,1981.8)
NetC25_2: C25.2 U8.1 | length 82.3
  Bottom Layer w10: C25.2@4693.43,726.07 U8.1
NetD1_1: D1.1 D2.1 U3.1 | length 482.4
  Top Layer w15: U3.1@3257.82,2021.38 3335.98,2021.38 D1.1 D2.1
NetD4_2: D4.2 D5.2 D6.2 R22.1 | length 2203.6
  Top Layer w20: R22.1@6512.92,504.08 D5.2@6742.01,275 ; D6.2 D5.2@6742.01,275 ; D5.2 D5.2@6742.01,275
  Bottom Layer w20: D4.2 5827.51,349.5 6668.5,349.5 D5.2@6726.32,291.68
NetDS1_1: DS1.1 R16.1 | length 235.4
  Top Layer w15: v1(4754.02,2168.63) DS1.1
  Bottom Layer w15: v1(4754.02,2168.63) R16.1
NetL1_2: L1.2 U8.3 | length 124.7
  Bottom Layer w10: U8.3 4815.09,755.72
  Bottom Layer w15: 4815.36,756 L1.2
NetR1_2: R1.2 U3.6 U3.7 | length 340.9
  Top Layer w15: v1(3187.9,1767.9) U3.6
  Top Layer w20: U3.7 U3.6
  Bottom Layer w15: R1.2 3074.82,1802.37 3109.29,1767.9 v1(3187.9,1767.9)
NetR3_1: R3.1 U1.12 U4.1 | length 327.8
  Top Layer w15: U1.12 v1(1520.11,2000)
  Bottom Layer w15: 1538.53,2018.42 R3.1 1766.64,2018.42 U4.1
  Bottom Layer w20: v1(1520.11,2000) 1538.53,2018.42
NetR8_1: R8.1 R10.2 U3.8 U3.9 | length 738.7
  Top Layer w15: 3446.34,1594.58 U3.8 U3.9 3725.88,1767.9 R10.2 ; R8.1 3446.92,1594
NetR16_2: R16.2 U7.1 | length 126.4
  Bottom Layer w15: U7.1 4850.5,1970.48 R16.2
NetR17_2: R17.2 U7.5 | length 110.9
  Bottom Layer w15: R17.2 4755.26,2069.25 U7.5
NetR19_1: R19.1 R21.2 U8.10 | length 295.2
  Bottom Layer w10: 4752.6,609.93 U8.10
  Bottom Layer w13: R21.2@4677.67,535 R21.2
  Bottom Layer w20: R21.2 4752.6,609.93
  Bottom Layer w40: R19.1 R21.2@4677.67,535
NetR26_2: R26.2 SW2.4 | length 151.6
  Top Layer w15: SW2.4 R26.2
POTCS: U2.7 U6.11 | length 795.9
  Top Layer w15: U2.7 2219.5,1567 2040.5,1388 2040.5,1212 2062.5,1190 2084.5,1168 2203.59,1168 U6.11@2290.5,1254.91
POTINC: U2.1 U6.12 | length 385.1
  Top Layer w15: U6.12@2190.5,1254.91 2204.94,1254.91 U2.1
POTU/D: U2.2 U6.13 | length 505.8
  Top Layer w15: U6.13@2090.5,1254.91 2123.15,1254.91 2435.24,1567 U2.2
RESET: D3.1 ICSP.5 R15.1 U6.1 | length 1863.7
  Top Layer w15: ICSP.5 2356.7,679.49 2356.7,482.42 2419.12,420 D3.1 v2(2733.5,420)
  Bottom Layer w15: v2(2733.5,420) 2733.5,820.13 2843,929.63 2843,997.5 3024.5,1179 3214.59,1179 U6.1@3290.5,1254.91
RGH: U2.3 U5.8 | length 444.9
  Top Layer w15: U5.8 v1(2356.7,1839) ; U2.3 v1(2540.42,1617)
  Bottom Layer w15: v1(2356.7,1839) 2356.7,1800.72 v1(2540.42,1617)
RGL: U2.6
RGW: U2.5 U5.1 | length 331
  Top Layer w15: U2.5 2453.98,1839 U5.1 v1(2541.74,1839)
SCK: ICSP.3 U6.19 | length 266.8
  Top Layer w15: U6.19@2390.5,954.91 2518.21,827.21 ICSP.3
"UVLO 2.6V": C21.1 R18.1 R20.2 U8.7 | length 400.7
  Bottom Layer w10: U8.7 4834.77,579.88 4855.5,559.15 R20.2
  Bottom Layer w15: R20.2 R18.1 C21.1@4945.67,308
VBAT: C17.2 C21.2 C23.1 L1.1 P4.1 R18.2 U6.24 U7.3 U8.5 U8.6 U8.8 | length 5625.3
  Top Layer w15: U6.24@2890.5,954.91 2890.5,583.5 3001,473 4287.07,473 4453.07,307 v2(5112.5,307)
  Top Layer w20: v6(4823.86,545.86) v6(4927.91,545.86) ; v6@4928.05,546 5117.5,546
  Top Layer w65: v2(5112.5,307) 5117.5,302 5117.5,546 5117.5,820 v2(5170.5,873)
  Bottom Layer w10: U8.8 4815.09,554.63 v6(4823.86,545.86) ; U8.6 v6@4918.53,545.86
  Bottom Layer w15: U7.3 4945.17,1894.92 C17.2 5003.5,1836.58 ; C21.2@5018.5,308 R18.2 ; v2(5112.5,307) v2@5117.5,302
  Bottom Layer w25: 4861,726 4868.37,733.37 C23.1
  Bottom Layer w40: C21.2 v2(5112.5,307)
  Bottom Layer w50: 5003.5,1208 5028.5,1183
  Bottom Layer w65: L1.1 5148.5,851 v2(5170.5,873) 5170.5,1155 5142.5,1183 5028.5,1183
  Bottom Layer w70: 5003.5,1208 5003.5,1836.58
VBUS: C14.2 C16.1 DS1.2 F1.2 U7.4 | length 1302.8
  Top Layer w20: v1(4692.99,2168.63) DS1.2
  Bottom Layer w15: 4583.5,1888 4608.5,1888 ; 4583.5,1895 C14.2 4755.18,1895 U7.4
  Bottom Layer w20: 4583.5,1888 4583.5,1895
  Bottom Layer w30: 4612.14,2168.63 v1(4692.99,2168.63)
  Bottom Layer w35: C16.1@4477.24,1330.63 F1.2@4477.24,1465
  Bottom Layer w40: 4583.5,2140 4612.14,2168.63
  Bottom Layer w50: 4583.5,1895 4583.5,2140
  Bottom Layer w65: F1.2@4477.24,1465 4477.24,1738.74 4608.5,1870
VCARRIER: P6.1 U1.8 U1.9 | length 1061.5
  Top Layer w15: U1.8 1547.5,1800 1708.5,1961 v1(1820.5,1961) ; v1(2181.5,2171.16) 2186.34,2176 P6.1
  Top Layer w20: U1.8 U1.9
  Bottom Layer w15: v1(1820.5,1961) 1854.5,1961 2064.67,2171.16 v1(2181.5,2171.16)
VCC: C24.1 P5.2 R19.2 U8.2 | length 4189.5
  Top Layer w30: 1630.25,624 P5.2
  Top Layer w40: 1479.75,624 1630.25,624
  Top Layer w50: v2@1404.5,624 1479.75,624
  Bottom Layer w10: 4733.06,804 U8.2@4795.4,741.66
  Bottom Layer w13: 4496.34,732 C24.1 4597.09,768 4633.09,804 4733.06,804
  Bottom Layer w50: v2(1401.82,626.68) 1537.82,626.68 1891.5,273 3970.9,273 4232.9,535 R19.2 4438.67,674.32 4496.34,732
VCC_T: P8.2 SW2.1 | length 1587.6
  Bottom Layer w45: SW2.1 97.5,482 97.5,1255 268.5,1426 268.5,1559 370.5,1661 P8.2
VLEFT: P6.3 U5.3 | length 291.2
  Top Layer w15: P6.3 2381.17,1995.33 2437.5,1939 U5.3
VREF: C10.1 C11.1 P6.4 R4.1 R5.1 R9.1 R13.1 R14.1 U1.5 U1.13 U1.14 U5.5 | length 3789.9
  Top Layer w15: U1.5 v1(1335.07,1900) 1380.5,1945.43 1380.5,2011.43 U1.13@1417.5,2048.43 ; 1365.61,2181.1 R9.1 R5.1 ; U1.14 v1(1520.11,2100) 1577.11,2043 2155.9,2043 v1(2209.9,1989) U5.5 ; P6.4 2423.5,2173 v1(2553.5,2173) 2689.82,2309.31 R14.1 C11.1 3151.19,2401 3612.5,2401 3663.5,2350 R13.1 R4.1 4113.5,2267.42 C10.1
  Top Layer w20: 1365.61,2181.1 U1.14 U1.13
  Bottom Layer w15: v1(2209.9,1989) 2301.5,1989 2485.5,2173 v1(2553.5,2173)
VRIGHT: P6.2 U5.2 | length 367.4
  Top Layer w15: P6.2 2341.84,1967.67 2420.5,1889 U5.2
VSIG: R6.2 U3.14 U6.23 | length 1642.3
  Top Layer w15: v1(3535.61,2017.9) v1@3535.61,2018.1
  Top Layer w20: U3.14 v1(3535.61,2017.9) ; v1@3535.61,2018.1 3557.92,2040.42 R6.2
  Bottom Layer w20: U6.23@2790.5,954.91 2790.5,1015.09 2939.5,1164.09 2939.5,1281 3423.5,1765 3423.5,1981 3460.4,2017.9 v1(3535.61,2017.9)
VUSB: C18.2 F1.1 P2.1 | length 476.9
  Top Layer w20: P2.1 4128.61,1390.11 4129.5,1391
  Top Layer w40: 4129.5,1391 v1(4129.5,1474.51)
  Bottom Layer w15: C18.2 C18.2@4309.25,1620.8
  Bottom Layer w55: v1(4129.5,1474.51) 4309.25,1474.51 C18.2@4309.25,1620.8
XTAL1: C15.2 U6.9 Y1.1 | length 1266.7
  Bottom Layer w15: C15.2 1500.57,1013.23 Y1.1 1633.34,1146 2381.59,1146 U6.9@2490.5,1254.91
XTAL2: C19.2 U6.10 Y1.2 | length 1104.6
  Bottom Layer w15: C19.2 1494.81,1199.6 Y1.2 1647.21,1211.29 1665.5,1193 2328.59,1193 U6.10@2390.5,1254.91
pads on no net: "Garment Conn..1" "Garment Conn..2" "Garment Conn..3" "Garment Conn..4" "Garment Conn..6" "Garment Conn..7" *.1 *.2 *.3 *.4 *.6 *.7 P2. P4. P5. P6. P7. U4.3 U9.2 U9.3 U9.6 U9.8 U9.9 U9.10 U9.11 U9.12 U9.13 U9.14 U9.22 U9.23 U9.24 U9.27 U9.28
copper on no net:
  other v2: 5794.5,2033 5859.5,2033 6465.5,2034 6530.5,2034 5794.5,2218 5859.5,2218 6465.5,2219 6530.5,2219
  other v3: 5855.5,1723 6175.8,1722.7 6526.5,1724 6846.8,1723.7 5805.5,1773 6222.1,1772.7 6476.5,1774 6893.1,1773.7 5798.5,2487.7 6222.1,2487.7 6469.5,2488.7 6893.1,2488.7 5848.5,2534 6175.8,2534 6519.5,2535 6846.8,2535
  other v5: 1587.5,231 4312.5,231 1587.5,2381 4312.5,2381
  other v8: 272.5,1252 272.5,2252

## Polygon pours and split planes (outlines as drawn)
+5V_T on Bottom Layer "+5V_T" (solid, remove dead copper, pour order 21): 39.5,2369 502.44,2369 503.5,2367.98 503.5,216 40.57,216
GND on Bottom Layer "GND_VSS" (solid, remove dead copper, pour order 26): 5138.5,2167.43 5138.5,1953.44 5137.27,1950.6 4928.41,1932.32 4871.4,1916 4827.5,1916 4804.5,1923.68 4741.5,1923.89 4702.19,1936 4629.5,1938 4627.5,1973.74 4630.98,2110.49 4631.76,2243 4710.5,2243 4722.5,2242 4723.5,2148.95 4709.72,2110.49 4710.77,2052.71 4733.6,1997.28 4871.4,1997.28 4887.5,2029.03 4915.13,2029.03 4915.13,2088.77 4915.78,2165.83 4993.87,2165.83 4993.18,2167.43
GND on Bottom Layer "BATT_GND" (solid, remove dead copper, pour order 30): 5091.5,964 4908.02,964 4906.5,966.65 4910.78,974.11 4910.78,1161 5092.5,1161
VBAT on Bottom Layer "BATT_VBAT" (solid, remove dead copper, pour order 28): 5091.5,1247 5092.5,1246 5092.5,1148 4915.5,1148 4910.5,1143 4910.78,1143.28 4910.78,1247
VBUS on Bottom Layer "VDD_CHRG" (solid, remove dead copper, pour order 27): 4701.5,1919 4709.5,1911 4780.5,1911 4780.5,1783 4781.5,1782 4547.5,1782 4547.5,1915 4545.5,1917
VBAT on Bottom Layer "VBAT" (solid, remove dead copper, pour order 24): 5138.5,1914.37 5134.09,1909.95 4821.5,1909.95 4821.5,1785 4822.5,1784 5138.5,1784
VCC on Bottom Layer "VCC" (solid, remove dead copper, pour order 25): 4775.99,776 4746.09,801 4658.09,889 4467.09,889 4467.09,703.26 4467.35,703 4636.09,703 4636.09,764.11 4636.87,764.9 4764.89,764.9
GND on Bottom Layer "BOARD_GND" (solid, remove dead copper, pour order 29): 650.01,2533 650.01,19 5250.01,19 5250.01,2533
GND on Bottom Layer "PGND" (solid, remove dead copper, pour order 22): 5032.99,680 5032.99,604 4905.56,606.18 4880.64,636 4840.68,652.65 4752.37,652.65 4713.69,627.1 4531.09,626.68 4531.09,638.15 4531.35,638.47 4531.35,692 4781.88,692 4844.5,691.82 4893.5,688
VBAT on Bottom Layer "VBAT" (solid, remove dead copper, pour order 23): 5220.5,918.95 5219.75,710.15 5076.65,709.85 5063.94,709 4848.09,709 4848.09,725.7 4848.47,726.07 4848.09,726.44 4848.09,748 4910.78,809 4910.78,919
GND_T on Top Layer "GND_T" (solid, remove dead copper, pour order 19): 40.5,216 40.5,2368 504.5,2368 504.5,216
GND on Top Layer "BATT_GND" (solid, remove dead copper, pour order 31): 5138.5,2165.83 5138.5,1953.44 4892.46,1953.44 4904.5,1965.48 4904.5,2167.43
AVS on Top Layer "AVS" (solid, remove dead copper, pour order 32): 3346.5,2508 3343.69,1435 827.5,1434 820.01,1443.12 823.76,1447.68 823.76,2511
GND on Top Layer "GND" (solid, remove dead copper, pour order 17): 4647.72,764.9 4643.68,760.87 4643.68,570.9 5029.4,570.9 5030.5,572 5040.5,571 5039.5,581 5040.5,600 5041.08,767.82
+5V on Top Layer "+5V" (solid, remove dead copper, pour order 20): 4411.5,740 4097.5,551.11 3452.5,289 1576.5,291.12 651.5,1089.12 650,1382 3553.5,1375.63 4091.5,1039.24 4410.5,932.07
GND_F on Top Layer "GND_F" (solid, remove dead copper, pour order 18): 5465.5,1345.5 5466.01,1345 5466.01,56.5 6913.5,56.5 6915.5,54.5 6914.5,55.5 6914.5,1344.5

## Keep-outs
Keep-Out Layer:
  lines w10: 650.01,63 650.01,2539 5250.01,2539 5250.01,63 650.01,63

## Silkscreen, mask and mechanical layers (free items; w line width, h text height)
Top Overlay:
  lines w10: 5304.5,6 2839.5,6 1724.5,6 610.5,6 609.5,5 609.5,268 609.5,847 609.5,1285.94 609.5,2236 609.5,2606 5309.5,2606 ; 5307.5,3 5307.5,2604 ; 22.5,202 22.5,2391 522.5,2391 522.5,202 22.5,202 ; 5422.51,2.5 5425.01,0 6962.5,0 6962.5,1388.5 5422.51,1388.5 5422.51,2.5
  lines w15: 1748,528.82 1749,529.82 ; 3091,517 3092,518 ; 4172.03,1363 4173.03,1364
  text "Top Panel" at 53,2427 h100
  text "Charging" at 4608.5,2232 h60
  text "1(R)" at 2309.06,2030.4 h50 r90
  text "2(Y)" at 2350.37,2030.35 h50 r90
  text "3(G)" at 2391.69,2030.4 h50 r90
  text "4(B)" at 2433,2030.4 h50 r90
  text "GND" at 243.21,1941 h60
  text "DUR2" at 218,1842 h60
  text "DUR1" at 227.01,1738 h60
  text "VCC" at 246,1634 h60
  text "+5V" at 266,1537 h60
  text "Front Panel" at 5832,1421 h150
  text "GND" at 4016,1388 h60 r90
  text "D-" at 4066,1383 h60 r90
  text "D+" at 4108,1383 h60 r90
  text "VUSB" at 4173.03,1364 h60 r90
  text "Green" at 6670,1313 h60
  text "Caleb Durante (2014)" at 1037,134 h60 r90
  text "All Rights Reserved" at 1101.71,134 h60 r90
  text "CaRe Monitor" at 971,128 h200 r90
  text "For Investigational Use Only" at 1863,121.15 h200
  text "Red" at 5483,72 h60
  text "Red" at 6804,64 h60
Bottom Overlay:
  text "+5V" at 5903.5,148.5 h60 r90
  text "MONITOREN" at 6014.5,148.5 h60 r90
  text "LED1" at 6112.5,148.5 h60 r90
  text "LED2" at 6210.5,148.5 h60 r90
  text "LED3" at 6308.5,148.5 h60 r90
  text "ALMOUT" at 6413.5,148.5 h60 r90
  text "GND" at 6513.5,148.5 h60 r90
Mechanical 2:
  lines w1: 0,0 6963,0 6963,2600 0,2600 0,0

## Text inside footprints (layer, text, board x,y; h text height)
*: Top Overlay "VCarr" at 6637.5,1701 h60 r90; Top Overlay "Right" at 6901.5,1954 h60 r180; Top Overlay "Left" at 6886.5,2353 h60 r180; Top Overlay "Vref" at 6639.5,2426 h60 r90; Top Overlay "1(R)" at 6625.5,1910 h60 r90; Top Overlay "2(Y)" at 6625.5,2010.94 h60 r90; Top Overlay "3(G)" at 6625.5,2112 h60 r90; Top Overlay "4(B)" at 6625.5,2213 h60 r90
"Garment Conn.": Top Overlay "4(B)" at 5954.5,2212 h60 r90; Top Overlay "3(G)" at 5954.5,2111 h60 r90; Top Overlay "2(Y)" at 5954.5,2009.94 h60 r90; Top Overlay "1(R)" at 5954.5,1909 h60 r90; Top Overlay "Vref" at 5968.5,2425 h60 r90; Top Overlay "Left" at 6215.5,2352 h60 r180; Top Overlay "Right" at 6230.5,1953 h60 r180; Top Overlay "VCarr" at 5966.5,1700 h60 r90
ICSP: Top Overlay "6" at 2358.21,661 h50 r180; Top Overlay "5" at 2358.21,761 h50 r180; Top Overlay "2" at 2718.21,661 h50 r180; Top Overlay "1" at 2698.21,761 h50 r180